# Altium PCB PCB2.PcbDoc
Units mm, origin at the board's own origin, x right, y up, seen from the top; angles counter-clockwise.
Board outline 25 x 35 mm, 2 copper layers (Top Layer, Bottom Layer); 7 components, 8 nets, 30 pads, 0 vias.
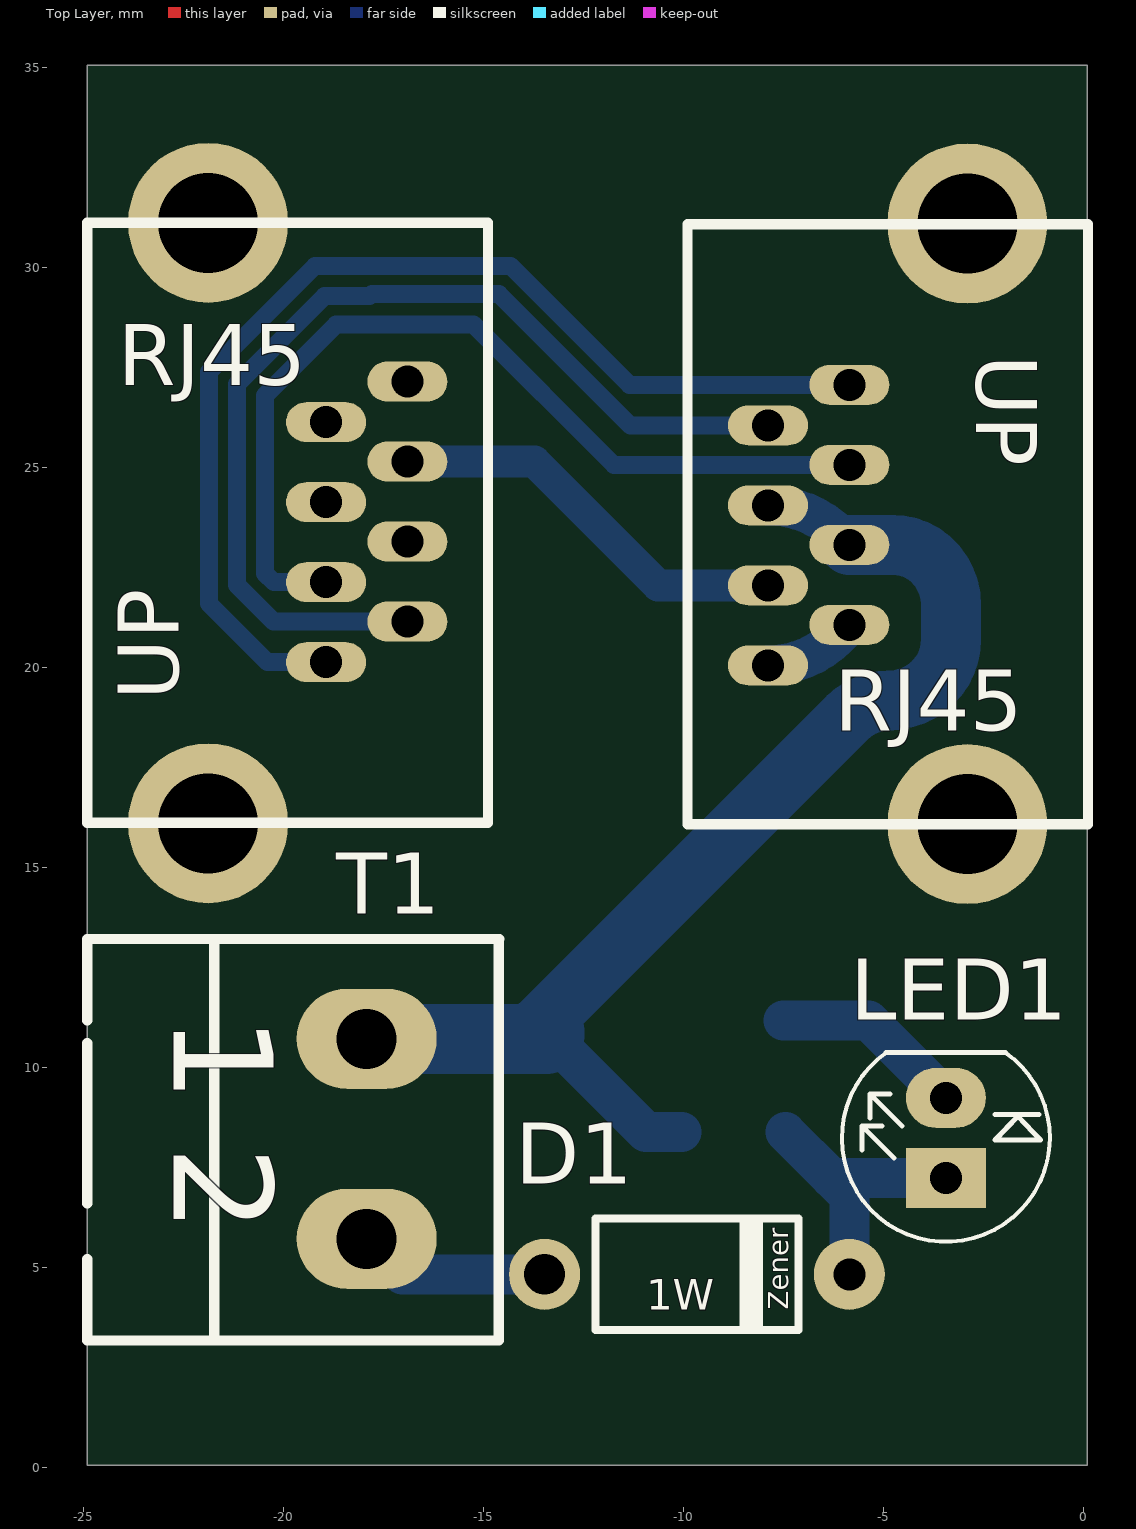
[diagram p0: Top Layer view]
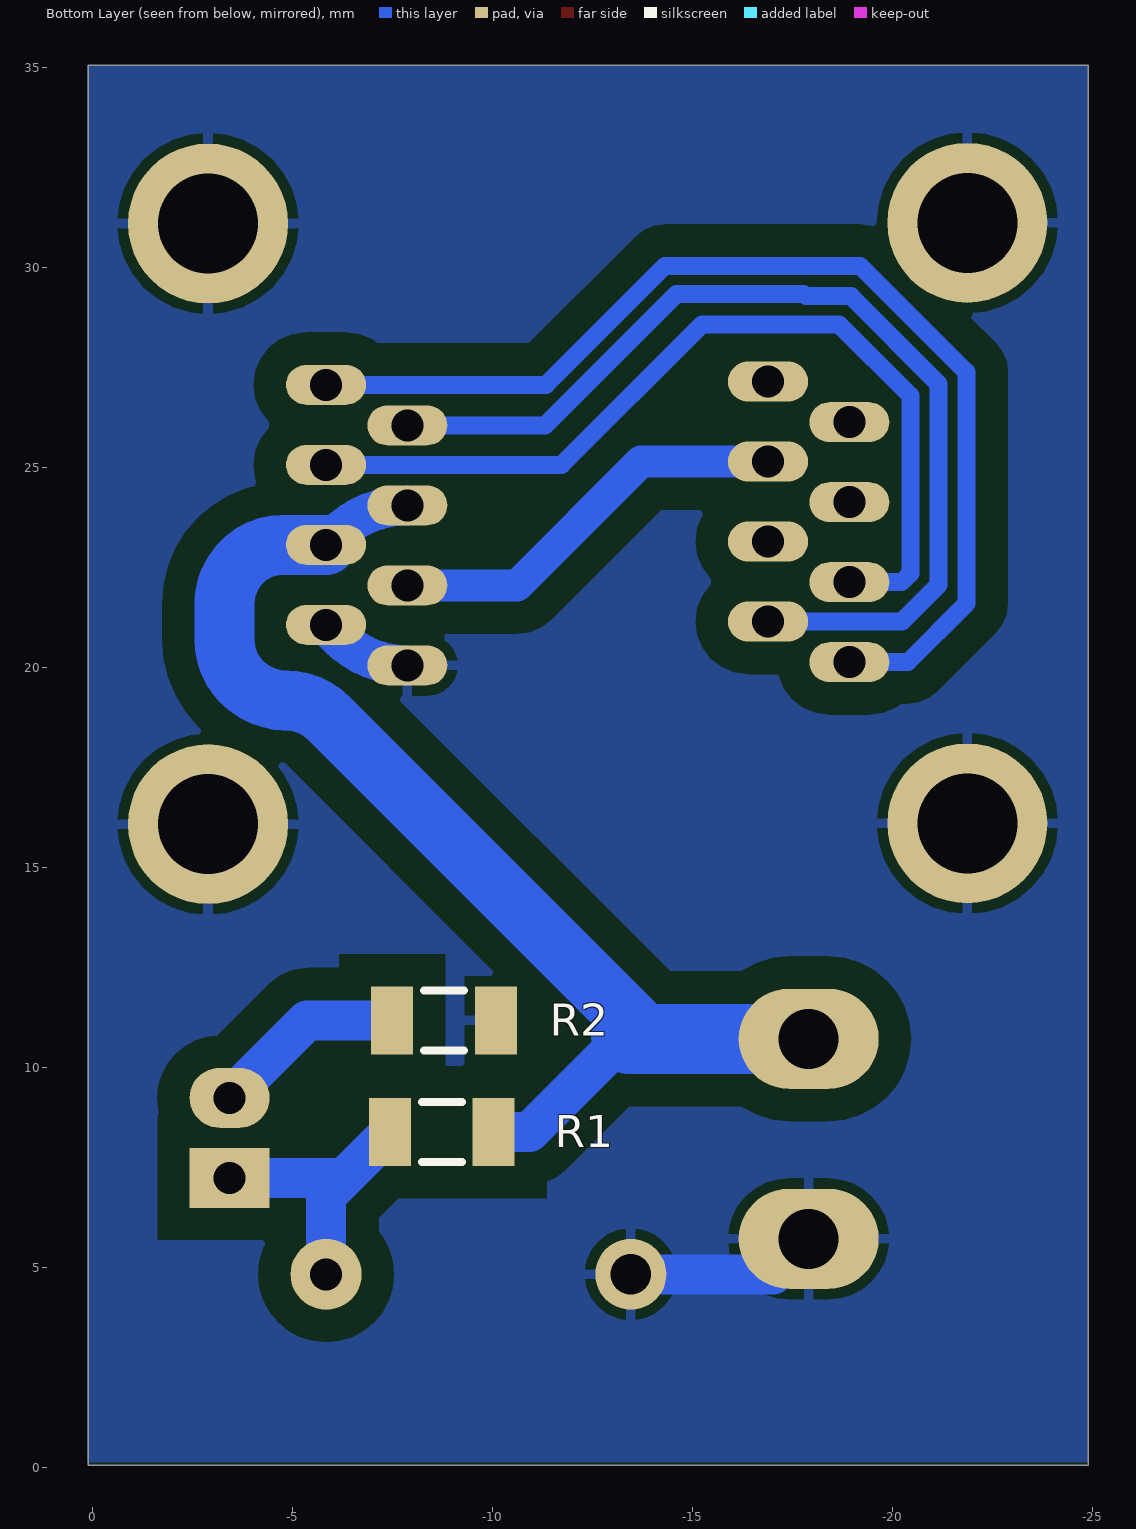
[diagram p1: Bottom Layer view, seen from below]

## Layer stack, top to bottom
Top Solder: solder mask 0.0102, Solder Resist, Dk 3.5
Top Layer: signal copper 0.0356
Dielectric 1: dielectric 0.32, FR-4, Dk 4.8
Bottom Layer: signal copper 0.0356
Bottom Solder: solder mask 0.0102, Solder Resist, Dk 3.5

## Board outline
-24.892,0.052 0.108,0.052 0.108,35.052 -24.892,35.052

## Design rules (kind name [scope] priority, off if disabled: settings)
Clearance [All] p1: gap=0.25 ignorepadtopadclearanceinfootprint=FALSE
PolygonConnect [All] p1: connectstyle=Relief reliefconductorwidth=0.254 reliefentries=4 polygonreliefangle="90 Angle" airgapwidth=0.254
RoutingVias [All] p1: holewidth=0.711 width=1.27 viastyle="Through Hole" minholewidth=0.711 minwidth=1.27 maxholewidth=0.711 maxwidth=1.27
SolderMaskExpansion [All] p1: expansion=0.102
Width [All] p1: maxlimit=3 minlimit=0.254 preferedwidth=1.5
30 further rules are at their usual default settings.

## Classes and differential pairs
component class Sheet2: D1 LED1 R1 R2 RJ45 T1

## Components (designator, comment, footprint, x,y, rotation, side; value= is the part's Value field where it differs from the comment)
D1 "Diode Zener" "Diode 1W" -9.652,4.826 r0 top
LED1 "Red" LED-5mm -3.429,7.239 r90 top
R1 "330R" "RES 1206 (3216X08L)" -10.033,8.382 r0 bottom
R2 "330R" "RES 1206 (3216X08L)" -10.089,11.176 r0 bottom
RJ45 "RJ45-w57-1" rj45-w57-1 -16.891,21.146 r90 top (schematic designator RJ45-w57-1)
RJ45 "RJ45-w57-1" rj45-w57-1 -7.874,26.05 r270 top (schematic designator RJ45-w57-2)
T1 "Phoenix terminal" "phoenix terminal 2" -29.591,13.208 r270 top

## Footprints (in the part's own frame and the unit in brackets; to place one, negate y for a bottom-side part, rotate by r counter-clockwise, add the part's x,y. Pads: shape width x height; smd on the part's side, far side on the other; paste and mask are expansions set on the pad)
"Diode 1W" [mil]
  round 70 hole 40: 1(-150,0)
  round 70 hole 31.5: 2(150,0)
  silkscreen extent -100,-55 100,55, body extent -166,-52 165,52, height 131
LED-5mm [mm]
  rect 1.5x2 hole 0.8: 1(0,0)
  oval 1.5x2 hole 0.8: 2(2,0)
  silkscreen extent -1.6,-2.6 3.13,2.6
"phoenix terminal 2" [mm] "2 terminals"
  oval 2.5x3.5 hole 1.5: 1(2.493,11.684) 2(7.493,11.684)
  silkscreen extent 0,4.7 10.03,15
"RES 1206 (3216X08L)" [mm] "Chip Resistor, 2-Leads, Body 3.2x1.6mm, IPC High Density _ (0.125 W)"
  rect 1.05x1.7 smd: 1(0,0) 2(2.596,0)
  silkscreen extent 0.8,-0.75 1.8,0.75, body extent -0.23,-0.76 2.82,0.76, height 0.6
rj45-w57-1 [mm]
  oval 1x2 hole 0.8: 1(-1.016,2.032) 2(0,0) 3(0.984,2.032) 4(2,0) 5(2.984,2.032) 6(4,0) 7(4.984,2.032) 8(6,0)
  round 4 hole 2.5: 9(-5.046,4.983) 10(9.97,4.983)
  silkscreen extent -5.03,-2.02 9.97,8

## Part data
D1: "Zener Diode", Voltage=12V, Company=E.P.I.L, Design Date=2011/11/02, Designer="Saeid Jorablo"
LED1: library part LED, "LED", Adding Date=1387/12/22, Color=Red, Designer="Saeid Jorablo", Organazation=ControTec, Size="SMD 1206"
R1 R2: library part Resistor, "Resistor", Power="1/8 W", Tolerance=5%
T1: library part "Phoenix terminal 2", "Terminal 2 Pin", ComponentLinkURL=www.picpars.com, Designer="Seyed Mohsen Ghasemain", E-mail=picpars@gmail.com

## Nets (pads, with @x,y where several pads share a name; then routed paths per layer and width w, separated by ;. In a path a pad name is that pad's centre, name@x,y a point inside that pad or via, vN(x,y) a via of type N, cw(c..) or ccw(c..) an arc to the next point about the centre after c; other vN are vias at no path point)
GND: D1.1 R2.1 RJ45.7@-5.842,21.066 RJ45.8@-7.874,20.05 RJ45.9 RJ45.10 T1.2 | length 7.2
  Bottom Layer w1: T1.2 -17.018,4.826 D1.1 ; RJ45.8@-7.874,20.05 ccw(c-7.874,22.503) -6.14,20.768 RJ45.7@-5.842,21.066
NetD1_2: D1.2 LED1.1 R1.2 | length 7.1
  Bottom Layer w1: R1.2 -6.294,7.239 ; D1.2 -5.842,6.787 -6.294,7.239 ; LED1.1 -6.294,7.239
NetLED1_2: LED1.2 R2.2 | length 4.9
  Bottom Layer w1: R2.2 -5.366,11.176 LED1.2
NetRJ45-w57-1_1: RJ45.1 | length 27.7
  Bottom Layer w0.45: RJ45.1@-18.923,20.13 -20.384,20.13 -21.855,21.601 -21.855,27.38 -19.194,30.041 -14.313,30.041 -11.338,27.066 RJ45.1@-5.842,27.066
NetRJ45-w57-1_2: RJ45.2 | length 25.2
  Bottom Layer w0.45: RJ45.2@-16.891,21.146 -16.896,21.151 -20.242,21.151 -21.151,22.06 -21.151,27.089 -18.961,29.279 -17.838,29.279 -17.78,29.337 -14.605,29.337 -11.318,26.05 RJ45.2@-7.874,26.05
NetRJ45-w57-1_3: RJ45.3 | length 22.9
  Bottom Layer w0.45: RJ45.3@-18.923,22.13 -20.225,22.13 -20.447,22.352 -20.447,26.797 -18.669,28.575 -15.24,28.575 -11.731,25.066 RJ45.3@-5.842,25.066
NetRJ45-w57-1_6: RJ45.6 | length 10.3
  Bottom Layer w0.8: RJ45.6@-16.891,25.146 -13.716,25.146 -10.62,22.05 RJ45.6@-7.874,22.05
VCC: R1.1 RJ45.4@-7.874,24.05 RJ45.5@-5.842,23.066 T1.1 | length 30.9
  Bottom Layer w1: -13.335,10.795 -10.922,8.382 R1.1 ; RJ45.4@-7.874,24.05 cw(c-7.874,21.52) -6.085,23.309 RJ45.5@-5.842,23.066
  Bottom Layer w1.5: -14.351,10.715 ccw(c-14.351,11.748) -13.62,11.018 -5.91,18.728 cw(c-4.826,17.644) -4.826,19.177 ccw(c-4.826,20.701) -3.302,20.701 -3.302,21.59 ccw(c-4.778,21.59) -4.778,23.066 RJ45.5@-5.842,23.066
  Bottom Layer w1.75: T1.1 -14.351,10.715 -13.415,10.715 -13.335,10.795 -13.335,10.902
pads on no net: RJ45.4@-16.891,23.146 RJ45.5@-18.923,24.13 RJ45.7@-18.923,26.13 RJ45.8@-16.891,27.146

## Polygon pours and split planes (outlines as drawn)
GND on Bottom Layer "Top Layer-No Net" (solid, remove dead copper, pour order 0): -24.892,35.052 0.127,35.052 0.127,0.127 -24.892,0.127

## Silkscreen, mask and mechanical layers (free items; w line width, h text height)
Mechanical 1:
  the board outline again, w0.254

## Text inside footprints (layer, text, board x,y; h text height)
D1: Top Overlay "1W" at -10.922,3.937 h0.76; Top Overlay "Zener" at -7.366,3.937 h0.5 r90
RJ45: Top Overlay "UP" at -22.606,19.177 h1.52 r90
RJ45: Top Overlay "UP" at -2.667,27.813 h1.52 r270
T1: Top Overlay "1 2" at -22.733,11.303 h2.5 r270